# Altium PCB HuLaMachDieuKhien.PcbDoc
Units mm, origin at the board's own origin, x right, y up, seen from the top; angles counter-clockwise.
Board outline 140.76 x 140.47 mm, 2 copper layers (Top Layer, Bottom Layer); 84 components, 67 nets, 242 pads, 8 vias.
Unrouted connection lines stored in the file: 1.
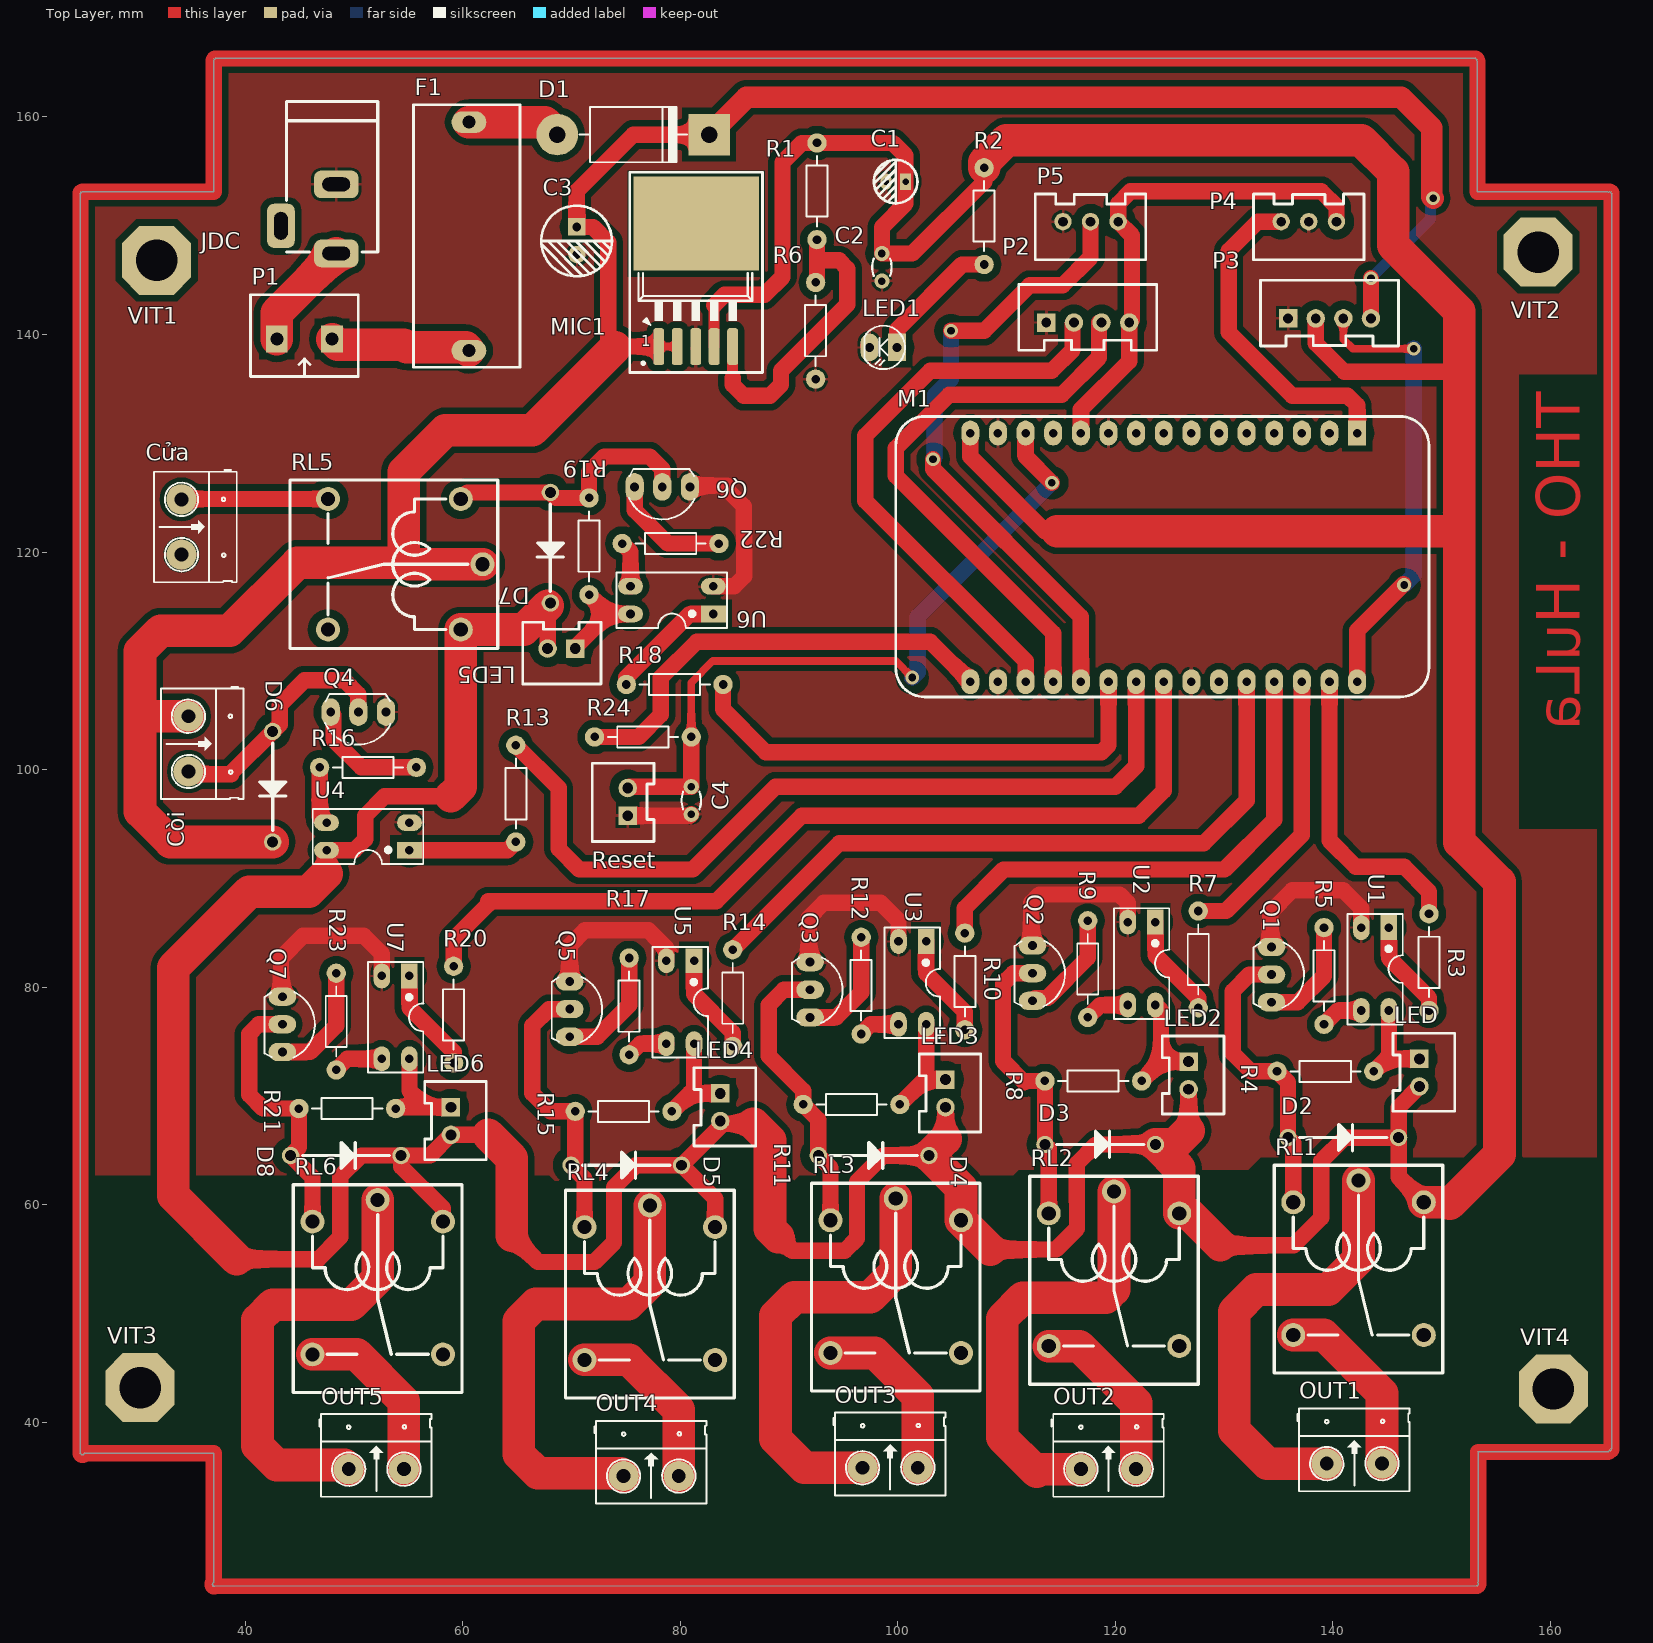
[diagram p0: Top Layer view]
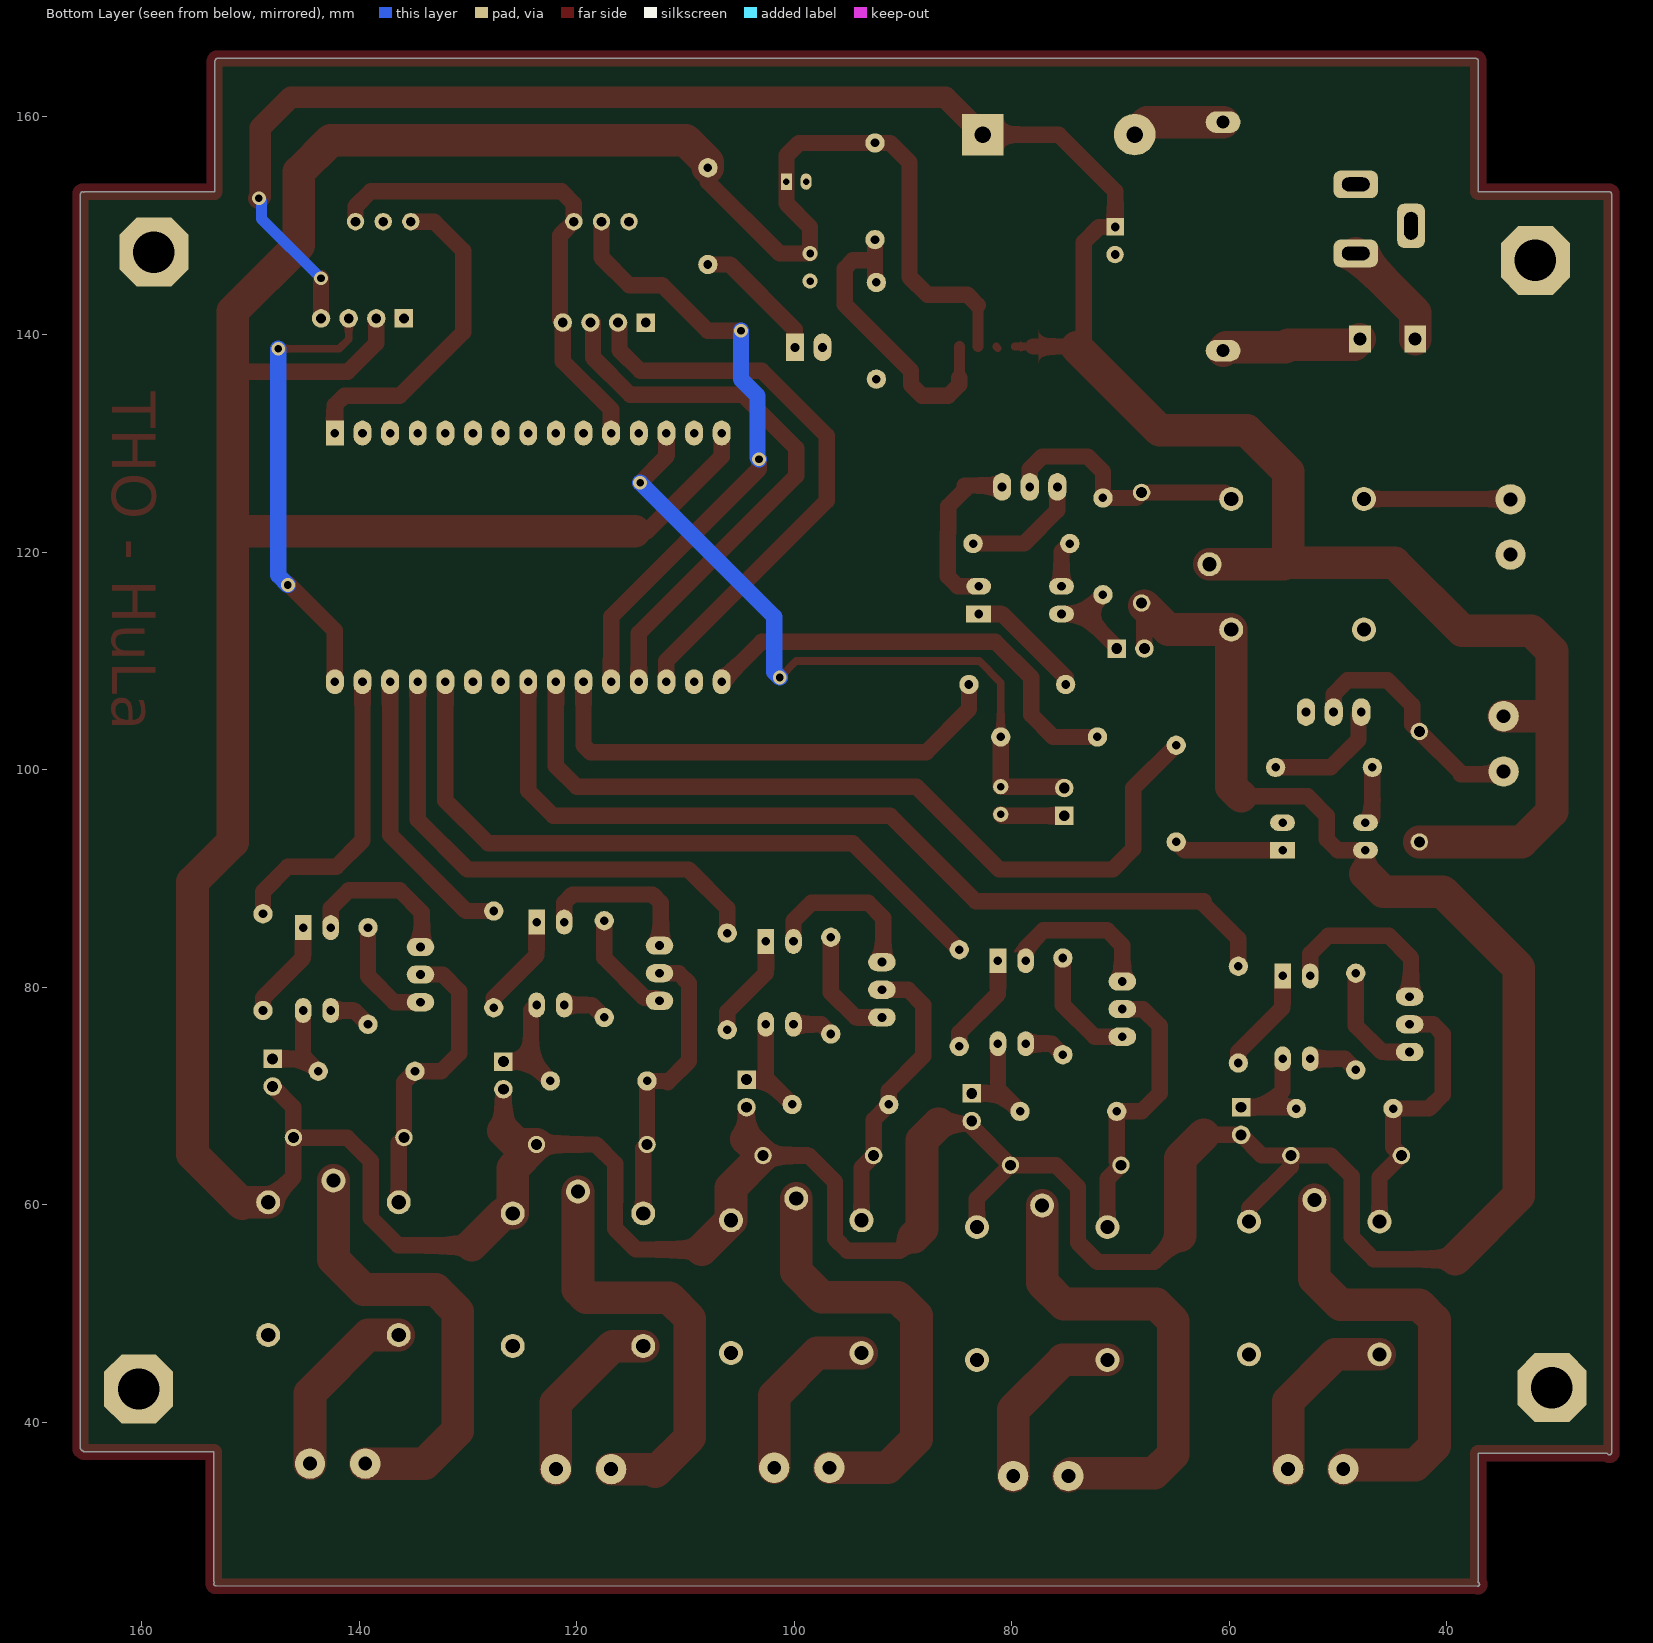
[diagram p1: Bottom Layer view, seen from below]
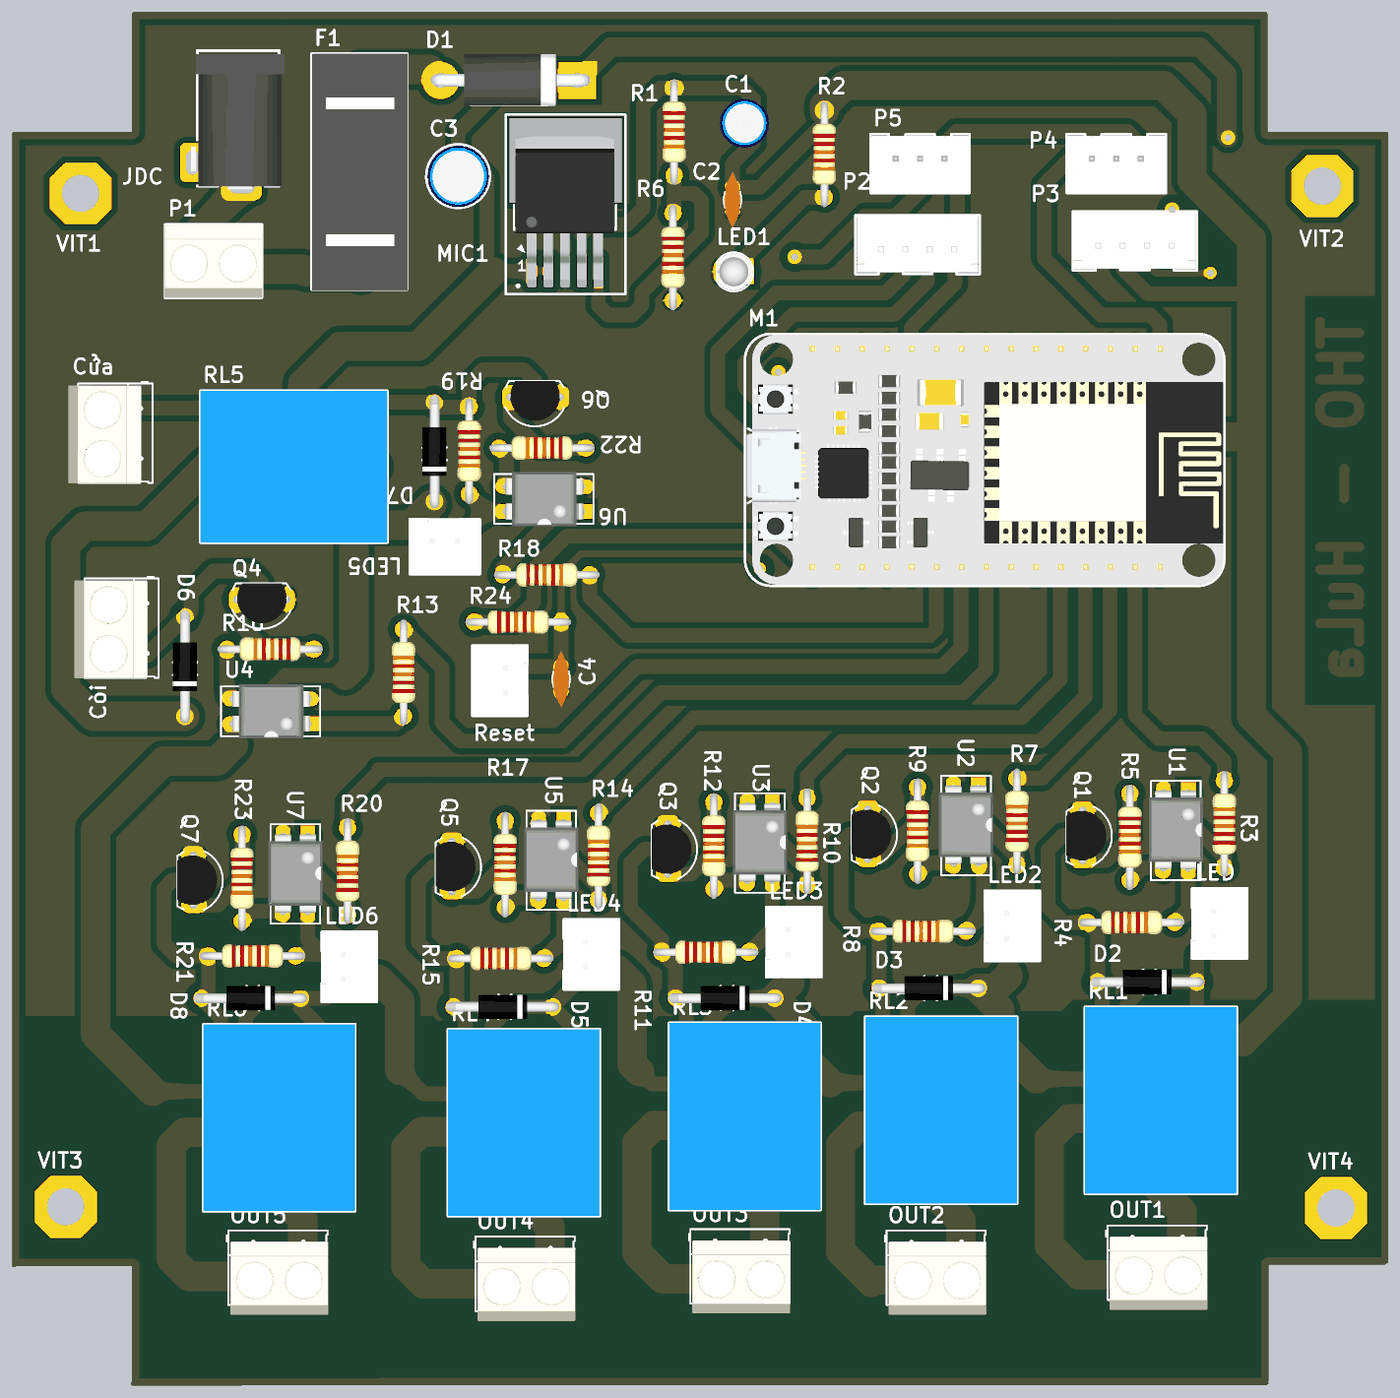
[diagram p2: 3D render of the assembled board from above, using the file's embedded part models]

## Layer stack, top to bottom
Top Solder: solder mask 0.0102, Solder Resist, Dk 3.5
Top Layer: signal copper 0.0356
Dielectric 1: dielectric 0.32, FR-4, Dk 4.8
Bottom Layer: signal copper 0.0356
Bottom Solder: solder mask 0.0102, Solder Resist, Dk 3.5

## Board outline
37.138,25.4 37.138,37.138 25.273,37.138 cw(c25.273,37.338) 25.259,37.138 cw(c25.072,37.211) 24.872,37.211 24.872,152.908 cw(c25.072,152.908) 25.072,153.108 37.138,153.108 37.138,165.1 cw(c37.338,165.1) 37.141,165.137 cw(c37.338,165.173) 37.338,165.374 153.035,165.374 cw(c153.035,165.173) 153.235,165.18 cw(c153.097,165.035) 153.297,165.035 153.297,153.108 165.227,153.108 cw(c165.227,152.908) 165.327,153.081 cw(c165.427,152.908) 165.628,152.908 165.628,37.592 cw(c165.427,37.592) 165.414,37.392 cw(c165.227,37.465) 165.227,37.265 153.362,37.265 153.362,25.403 cw(c153.162,25.403) 153.316,25.275 cw(c153.162,25.146) 153.362,25.146 cw(c153.162,25.146) 153.162,24.946 37.211,24.903 cw(c37.211,25.104) 37.165,25.299 cw(c37.338,25.4)

## Design rules (kind name [scope] priority, off if disabled: settings)
Clearance [All] p1: gap=0.6 ignorepadtopadclearanceinfootprint=FALSE except(1.2: Arc-Hole Track-Hole SMDPad-Hole THPad-Hole Via-Hole Fill-Hole Poly-Hole Region-Hole Text-Hole)
PolygonConnect [All] p1: connectstyle=Relief reliefconductorwidth=0.254 reliefentries=4 polygonreliefangle="90 Angle" airgapwidth=0.254
RoutingVias [All] p1: holewidth=0.711 width=1.27 viastyle="Through Hole" minholewidth=0.711 minwidth=1.27 maxholewidth=0.711 maxwidth=1.27
SolderMaskExpansion [All] p1: expansion=0.102
Width [All] p1: maxlimit=3 minlimit=1 preferedwidth=1.5
30 further rules are at their usual default settings.

## Components (designator, comment, footprint, x,y, rotation, side; value= is the part's Value field where it differs from the comment)
C1 "10uF-16V" "tu hoa 4mm" 99.822,154.051 r180 top
C2 "5AK220KABAA" CAPNTO2.54-3.05x1.78A 98.552,146.177 r270 top value="100nF, 16V"
C3 "100uF-35V" "tu hoa 6.5mm" 70.485,148.59 r270 top
C4 "5AK220KABAA" CAPNTO2.54-3.05x1.78A 81.026,97.155 r270 top value=C103
Còi "Header 2_1" HED2 34.798,104.902 r270 top value="Header 2"
Cửa "Header 2_1" HED2 34.163,124.841 r270 top value="Header 2" (schematic designator C?a)
D1 "1N5408" D5A 82.677,158.369 r180 top
D2 "1N4007" 1N4007 135.89,66.167 r0 top
D3 "1N4007" 1N4007 113.538,65.532 r0 top
D4 "1N4007" 1N4007 92.71,64.516 r0 top
D5 "1N4007" 1N4007 69.977,63.627 r0 top
D6 "1N4007" 1N4007 42.545,103.505 r270 top
D7 "1N4007" 1N4007 68.072,125.476 r270 top
D8 "1N4007" 1N4007 44.196,64.516 r0 top
F1 "Fuse" FUSE_BOX 60.579,138.512 r90 top
JDC "Jac DC" DC-IN 45.847,150.622 r270 top
LED "2.54-2p" "Header Duc Thang 2P 2.54" 147.955,73.406 r0 top
LED1 "LED" LED-3 99.949,138.811 r180 top value="LED 3 ly Single Colour"
LED2 "2.54-2p" "Header Duc Thang 2P 2.54" 126.746,73.152 r0 top
LED3 "2.54-2p" "Header Duc Thang 2P 2.54" 104.394,71.501 r0 top
LED4 "2.54-2p" "Header Duc Thang 2P 2.54" 83.693,70.231 r0 top
LED5 "2.54-2p" "Header Duc Thang 2P 2.54" 70.358,111.125 r270 top
LED6 "2.54-2p" "Header Duc Thang 2P 2.54" 58.928,68.961 r0 top
M1 "NodeMCU ESP8266" "NodeMCU ESP8266" 124.46,119.507 r270 top
MIC1 "U?" Mic5V 81.28,145.415 r180 top
OUT1 "Header 2_1" HED2 139.446,36.195 r0 top value="Header 2"
OUT2 "Header 2_1" HED2 116.84,35.687 r0 top value="Header 2"
OUT3 "Header 2_1" HED2 96.774,35.814 r0 top value="Header 2"
OUT4 "Header 2_1" HED2 74.803,35.052 r0 top value="Header 2"
OUT5 "Header 2_1" HED2 49.53,35.687 r0 top value="Header 2"
P1 "Công Tắc" "Medium - Header 2" 45.466,139.573 r180 top
P2 "UART" "Header Duc Thang 4p 2.54" 117.475,141.097 r180 top
P3 "SHOW_NGUỒN" "Header Duc Thang 4p 2.54" 139.7,141.478 r180 top
P4 "Khí Ga" "Header duc thang 3p 2.54" 137.795,150.368 r0 top
P5 "DHT11" "Header duc thang 3p 2.54" 117.729,150.368 r0 top
Q1 "C1815" QTO-92 134.366,81.153 r270 top
Q2 "C1815" QTO-92 112.395,81.28 r270 top
Q3 "C1815" QTO-92 91.948,79.756 r270 top
Q4 "C1815" QTO-92 50.419,105.283 r180 top
Q5 "C1815" QTO-92 69.85,77.978 r270 top
Q6 "C1815" QTO-92 78.359,125.984 r180 top
Q7 "C1815" QTO-92 43.434,76.581 r270 top
R1 "4K7" R1/4W 92.583,148.717 r90 top value="R1/4W - 1K"
R2 "1k" R1/4W 107.95,146.431 r90 top value="R1/4W - 1K"
R3 "1k" R1/4W 148.844,86.741 r270 top value="R1/4W - 1K"
R4 "1K" R1/4W 143.764,72.263 r180 top value="R1/4W - 1K"
R5 "4K7" R1/4W 139.192,76.581 r90 top value="R1/4W - 1K"
R6 "1K5" R1/4W 92.456,135.89 r90 top value="R1/4W - 1K"
R7 "1k" R1/4W 127.635,86.995 r270 top value="R1/4W - 1K"
R8 "1K" R1/4W 122.428,71.374 r180 top value="R1/4W - 1K"
R9 "4K7" R1/4W 117.475,77.216 r90 top value="R1/4W - 1K"
R10 "1k" R1/4W 106.172,84.963 r270 top value="R1/4W - 1K"
R11 "1K" R1/4W 100.203,69.215 r180 top value="R1/4W - 1K"
R12 "4K7" R1/4W 96.647,75.692 r90 top value="R1/4W - 1K"
R13 "1k" R1/4W 64.897,102.235 r270 top value="R1/4W - 1K"
R14 "1k" R1/4W 84.836,83.439 r270 top value="R1/4W - 1K"
R15 "1K" R1/4W 79.248,68.58 r180 top value="R1/4W - 1K"
R16 "4K7" R1/4W 46.863,100.203 r0 top value="R1/4W - 1K"
R17 "4K7" R1/4W 75.311,73.787 r90 top value="R1/4W - 1K"
R18 "1k" R1/4W 83.947,107.823 r180 top value="R1/4W - 1K"
R19 "1K" R1/4W 71.628,116.078 r90 top value="R1/4W - 1K"
R20 "1k" R1/4W 59.182,81.915 r270 top value="R1/4W - 1K"
R21 "1K" R1/4W 53.848,68.834 r180 top value="R1/4W - 1K"
R22 "4K7" R1/4W 74.676,120.777 r0 top value="R1/4W - 1K"
R23 "4K7" R1/4W 48.387,72.39 r90 top value="R1/4W - 1K"
R24 "1K5" R1/4W 81.026,102.997 r180 top value="R1/4W - 1K"
Reset "2.54-2p" "Header Duc Thang 2P 2.54" 75.184,95.758 r180 top
RL1 "Relay 5V/10A" RL_10A_5V 142.367,55.118 r270 top value="Relay SPDT, 10A, 12V"
RL2 "Relay 5V/10A" RL_10A_5V 119.888,54.102 r270 top value="Relay SPDT, 10A, 12V"
RL3 "Relay 5V/10A" RL_10A_5V 99.822,53.467 r270 top value="Relay SPDT, 10A, 12V"
RL4 "Relay 5V/10A" RL_10A_5V 77.216,52.832 r270 top value="Relay SPDT, 10A, 12V"
RL5 "Relay 5V/10A" RL_10A_5V 54.737,118.872 r180 top value="Relay SPDT, 10A, 12V"
RL6 "Relay 5V/10A" RL_10A_5V 52.197,53.34 r270 top value="Relay SPDT, 10A, 12V"
U1 "PC817" DIP4/W0.3 145.161,85.471 r180 top
U2 "PC817" DIP4/W0.3 123.698,85.979 r180 top
U3 "PC817" DIP4/W0.3 102.616,84.201 r180 top
U4 "PC817" DIP4/W0.3 55.118,92.583 r90 top
U5 "PC817" DIP4/W0.3 81.28,82.423 r180 top
U6 "PC817" DIP4/W0.3 83.058,114.3 r90 top
U7 "PC817" DIP4/W0.3 55.118,81.026 r180 top
VIT1 "1" VIT 31.877,146.812 r0 top
VIT2 "1" VIT 158.877,147.574 r0 top
VIT3 "1" VIT 30.353,43.18 r0 top
VIT4 "1" VIT 160.274,43.053 r0 top

## Footprints (in the part's own frame and the unit in brackets; to place one, negate y for a bottom-side part, rotate by r counter-clockwise, add the part's x,y. Pads: shape width x height; smd on the part's side, far side on the other; paste and mask are expansions set on the pad)
1N4007 [mm] "DIODE_DIP"
  round 1.6 hole 1 mask+0.1: 1(0,0) 2(10.16,0)
  silkscreen extent 1.08,-1.2 9.08,1.21, body extent -0.72,-1.25 10.88,1.25, height 2.75
CAPNTO2.54-3.05x1.78A [mm] "Capacitor, Radial, Tantalum, Non-Polarised; Body 3.05 x 1.78 x 3.43 mm (WxTxH max); Pin Spacing 2.54 mm (typ)"
  round 1.4 hole 0.7: 1(-1.27,0) 2(1.27,0)
  silkscreen extent -0.8,-0.89 0.8,0.89, body extent -2.92,-0.85 2.92,0.85, height 6.42
D5A [mil] "Diode 5A, W 200mil, L 550mil"
  round 150 hole 60: 1(550,0)
  rect 150x150 hole 60: 2(0,0)
  silkscreen extent 80,-100 470,100, body extent -52,-106 590,103, height 254
DC-IN [mil] "Jac DC input"
  rrect50% 100x160 hole 50 slot 100 at 90 deg: 1(125,100) 2(-125,100)
  rrect50% 160x100 hole 50 slot 100 at 0 deg: 3(25,-100)
  silkscreen extent -425,-80 120,250, body extent -410,-105 134,269, height 434
DIP4/W0.3 [mil] "4 PIN, W 300mil, Pin to pin 100mil"
  rect 60x90 hole 31: 1(0,0)
  oval 60x90 hole 31: 2(100,0) 3(100,300) 4(0,300)
  silkscreen extent -50,-50 150,350, body extent -59,-10 159,305, height 170
FUSE_BOX [mm]
  oval 2x3.2 hole 1.2: 1(0,0) 2(21,0)
  silkscreen extent -1.52,-4.7 22.61,5.08, body extent -1.59,-4.77 22.61,5.03, height 10.8
"Header Duc Thang 2P 2.54" [mm]
  rect 1.7x1.7 hole 1: 1(0,0)
  round 1.7 hole 1: 2(0,-2.54)
  silkscreen extent -2.41,-4.83 3.25,2.36, body extent -2.47,-4.94 3.33,2.46, height 7
"Header duc thang 3p 2.54" [mm]
  round 1.6 hole 0.9: 1(2.54,0) 2(0,0) 3(-2.54,0)
  silkscreen extent -5.08,-3.5 5.08,2.54, body extent -4.95,-3.4 4.95,2.35, height 7
"Header Duc Thang 4p 2.54" [mm]
  rect 1.7x1.7 hole 0.9: 1(3.81,0)
  round 1.7 hole 0.9: 2(1.27,0) 3(-1.27,0) 4(-3.81,0)
  silkscreen extent -6.35,-3.5 6.35,2.54, body extent -6.2,-3.4 6.2,2.35, height 7
HED2 [mil] "Header 2, 2 pin, hight 300mil, Pin to Pin 200, Colour Green"
  round 110 hole 50: 1(0,0) 2(200,0)
  silkscreen extent -106,-100 300,200, body extent -92,-140 302,155, height 394
LED-3 [mil] "LED 2 PIN, 3ly Only colour"
  rect 65x100 hole 32: 1(0,0)
  oval 65x100 hole 32: 2(100,0)
  silkscreen extent -29,-78 118,79, body extent -25,-75 113,75, height 217
"Medium - Header 2" [mm]
  rect 2x2.5 hole 1.2: 1(-2.54,0) 2(2.54,0)
  silkscreen extent -4.95,-4.08 4.95,3.43, body extent -5,-4.07 5,3.43, height 10
Mic5V [mm] "3A"
  rrect50% 1x3.4 smd: 1(3.248,6.528) 2(1.548,6.528) 4(-1.852,6.528) 5(-3.552,6.528)
  rrect50% 1x3.4 smd mask+0: 3(-0.152,6.528)
  rect 11.5x8.634 smd: 6(-0.202,-4.774)
  silkscreen extent -6.3,-9.49 5.9,8.91, body extent -5.2,-7.24 4.96,7.4, height 4.57
"NodeMCU ESP8266" [mil] "NodeMCU ESP8266"
  rect 90x65 hole 31: 1(-450,700)
  oval 90x65 hole 31: 2(-450,600) 3(-450,500) 4(-450,400) 5(-450,300) 6(-450,200) 7(-450,100) 8(-450,0) 9(-450,-100) 10(-450,-200) 11(-450,-300) 12(-450,-400) 13(-450,-500) 14(-450,-600) 15(-450,-700) 16(450,-700) 17(450,-600) 18(450,-500) 19(450,-400) 20(450,-300) 21(450,-200) 22(450,-100) 23(450,0) 24(450,100) 25(450,200) 26(450,300) 27(450,400) 28(450,500) 29(450,600) 30(450,700)
  silkscreen extent -510,-970 505,960, body extent -506,-966 500,956, height 311
QTO-92 [mil] "TO-92"
  oval 66x100 hole 32: 1(-100,0) 2(0,0) 3(100,0)
  silkscreen extent -117,-65 120,118, body extent -109,-66 109,95, height 245
R1/4W [mil] "R 1/4W, 2 Pin, 350mil"
  round 70 hole 31: 1(0,0) 2(350,0)
  silkscreen extent 48,-38 302,38, body extent -40,-47 386,47, height 111
RL_10A_5V [mm] "Relay SRD-05VDC-SL-C, 5 pin, 10A,19.1X15.5"
  round 2.2 hole 1.3 mask+0.1: 1(-7.1,0) 2(7.1,6) 3(7.1,-6) 4(-5.1,-6) 5(-5.1,6)
  silkscreen extent -8.5,-7.75 10.6,7.75, body extent -8.5,-7.75 10.6,7.75, height 15.8
"tu hoa 4mm" [mm]
  rect 1x1.5 hole 0.6: 1(-0.9,0)
  oval 1x1.5 hole 0.6: 2(0.9,0)
  silkscreen extent -2,-2 2.01,2.01, body extent -2.47,-2.47 2.58,2.58, height 11.53
"tu hoa 6.5mm" [mm]
  rect 1.6x1.6 hole 0.8: 1(-1.295,0.025)
  round 1.6 hole 0.8: 2(1.245,0.025)
  silkscreen extent -3.25,-3.25 3.25,3.25, body extent -3.15,-3.15 3.2,3.2, height 11.53
VIT [mm] "VIT"
  oct 6.35x6.35 hole 3.81: VIT1(0,0)

## Part data
C1: library part "Tu Hoa 10uF 16V 4x7", "C?m", Chung_Loai=C?m, Don_Vi=Con, Ma_Hang=MH006855, So_Chan=2, Ten_Linh_Kien="T? Hóa 10uF 16V"
C2 C4: "CAP NPO CAPNTO 22pF 100V 10%", ComponentLink1Description=Datasheet, ComponentLink1URL="D:\Dropbox\Datasheets\Passive Components\Capacitors\AVX Disc Ceramic Capacitors.pdf", Unit Price=0.003
C3: library part "Tu Hoa 100uF 35V 6x8", "C?m", Chung_Loai=C?m, Don_Vi=Con, Ma_Hang=MH006862, So_Chan=2, Ten_Linh_Kien="T? Hóa 100uF 35V"
Còi Cửa OUT1 OUT2 OUT3 OUT4 OUT5: "Header, 2-Pin", Manufacturer="Generic Components", Class=Connector
D1: library part D5A, "Diode 5A"
D2 D3 D4 D5 D6 D7 D8: "Diode LS 1A 1000V DO-41", ComponentLink1Description=Datasheet, ComponentLink1URL="D:\Dropbox\Datasheets\Diodes and Rectifiers\Diodes\1N400X.pdf", Unit Price=0.0072
JDC: library part DCIN, "Jac DC input"
LED LED2 LED3 LED4 LED5 LED6 Reset: library part "Header 2.54-2p Duc Thang", "C?m", Chung_Loai=C?m, Don_Vi=Con, Ma_Hang=MH001283, So_Chan=2, Ten_Linh_Kien="Header 2P XH2.54-2P Ð?c Th?ng"
LED1: "LED Single colour Green and Red"
MIC1: library part Mic5V, "3A"
P1: library part "Header 2 - M", "Header, 2-Pin, Medium", LatestRevisionDate=17-Jul-2002, LatestRevisionNote="Re-released for DXP Platform.", Publisher="Altium Limited"
P2 P3: library part "Header 2.54_4p Duc Thang", "C?m", Chung_Loai=C?m, Don_Vi=Con, Ma_Hang=MH001285, So_Chan=4, Ten_Linh_Kien="Header 4P XH2.54-4P Ð?c Th?ng"
P4 P5: library part "Header 2.54_3p Duc Thang", "C?m", Chung_Loai=C?m, Don_Vi=Con, Ma_Hang=MH001292, Ten_Linh_Kien="Header 3P XH2.54-3P Ð?c Th?ng"
Q1 Q2 Q3 Q4 Q5 Q6 Q7: "NPN 600mW, ECB", =C2383
R1 R2 R3 R4 R5 R6 R7 R8 R9 R10 R11 R12 R13 R14 R15 R16 R17 R18 R19 R20 R21 R22 R23 R24: library part R1/4W, "Resistor 1/4W"
RL1 RL2 RL3 RL4 RL5 RL6: library part "Relay 5V10A", "Relay SPDT,10A - 12VDC 5 Pin", ="Relay SPDT, 10A, 24V"
U1 U2 U3 U4 U5 U6 U7: "Single Opto"
VIT1 VIT2 VIT3 VIT4: library part VIT, "Oc Vit"

## Via types
v1: diameter 1.27, hole 0.711, Top Layer to Bottom Layer, 8 vias

## Nets (pads, with @x,y where several pads share a name; then routed paths per layer and width w, separated by ;. In a path a pad name is that pad's centre, name@x,y a point inside that pad or via, vN(x,y) a via of type N, cw(c..) or ccw(c..) an arc to the next point about the centre after c; other vN are vias at no path point)
3V3: M1.11 M1.16 P2.4 P4.1 P5.1 R24.2 | length 87.8
  Top Layer w1.5: R24.2 76.2,102.997 78.232,105.029 78.232,108.458 81.534,111.76 102.997,111.76 M1.16 ; M1.11 116.84,133.096 121.285,137.541 P2.4 121.539,141.351 121.539,149.098 P5.1 120.269,152.019 121.412,153.162 138.938,153.162 140.335,151.765 P4.1
5V: C1.1 C2.1 D2.2 D3.2 D4.2 D5.2 D7.2 D8.2 LED2.2 LED3.2 LED4.2 LED5.2 LED6.2 LED.2 M1.15 MIC1.4 P3.2 R1.2 R2.2 RL1.5 RL2.5 RL3.5 RL4.5 RL5.5 RL6.5 U4.4 | length 574.8
  Top Layer w1: MIC1.4 83.132,142.695
  Top Layer w1.5: 39.243,54.991 46.736,54.991 48.768,57.023 48.768,62.611 50.673,64.516 D8.2 ; 47.498,90.424 U4.4 50.038,92.583 51.054,93.599 51.054,95.758 52.832,97.536 58.928,97.536 ; RL6.5 58.197,59.659 54.356,63.5 D8.2 ; 62.357,66.421 LED6.2 57.023,64.516 D8.2 ; 64.516,57.15 66.929,54.737 72.136,54.737 73.914,56.515 73.914,61.595 75.946,63.627 D5.2 ; LED5.2 67.818,115.062 D7.2 ; 83.132,142.695 84.074,143.637 87.757,143.637 89.408,145.288 89.408,155.829 91.186,157.607 R1.2 99.568,157.607 100.722,156.453 C1.1 100.722,152.03 98.552,149.86 C2.1 101.346,147.447 107.95,154.051 R2.2 ; RL4.5 83.216,60.548 D5.2 ; 86.741,67.437 83.947,67.437 LED4.2 83.693,67.183 D5.2 ; 89.027,57.023 90.297,55.753 95.123,55.753 96.266,56.896 96.266,62.103 98.679,64.516 D4.2 ; 104.394,66.04 LED3.2 ; M1.15 106.68,128.778 113.538,121.92 114.681,121.92 ; 108.509,55.88 114.554,55.88 116.488,57.814 116.488,60.279 116.459,60.308 116.459,63.754 118.237,65.532 D3.2 ; 126.746,66.802 LED2.2 ; 129.667,56.261 136.398,56.261 138.938,58.801 138.938,64.008 141.097,66.167 D2.2 ; P3.2 138.43,139.192 141.056,136.566 151.638,136.566 ; LED.2 146.05,68.961 D2.2 ; RL1.5 146.05,62.535 D2.2
  Top Layer w3: 39.243,54.991 33.401,60.833 33.401,81.788 40.386,88.773 45.847,88.773 47.498,90.424 ; 58.928,97.536 59.837,98.445 RL5.5 65.628,112.872 D7.2@67.818,115.062 ; 62.357,66.421 64.516,64.262 64.516,57.15 ; 86.741,67.437 88.265,65.913 88.265,57.785 89.027,57.023 ; 104.394,66.04 D4.2 105.822,61.564 RL3.5 108.509,55.88 ; R2.2 107.95,155.829 109.982,157.861 142.621,157.861 145.542,154.94 145.542,148.209 151.638,142.113 151.638,136.566 151.638,121.92 ; 114.681,121.92 151.638,121.92 ; 126.746,66.802 125.476,65.532 D3.2 125.888,63.342 RL2.5 126.726,59.202 129.667,56.261 ; RL1.5 150.602,60.218 150.749,60.071 155.321,64.643 155.321,89.662 151.638,93.345 151.638,121.92
  Bottom Layer w1.5: M1.15 M1.15@106.709,130.908
12V: C3.1 Còi.1 D1.2 D6.2 MIC1.1 MIC1.2 P3.4 RL5.1 | length 225.2
  Top Layer w0.7: 78.74,138.887 MIC1.2
  Top Layer w1.5: MIC1.1 74.117,138.887 74.041,138.811 73.406,139.446 73.406,148.463 71.984,149.885 C3.1 70.485,149.911 70.485,153.162 75.692,158.369 D1.2 ; P3.4 v1(143.51,145.161)
  Top Layer w2: D1.2 86.106,161.798 146.304,161.798 149.098,159.004 149.098,152.654 v1(149.225,152.527)
  Top Layer w3: Còi.1 30.607,104.902 30.353,105.156 ; D6.2 33.147,93.345 30.353,96.139 30.353,97.917 30.353,105.156 ; RL5.1 54.991,118.872 54.864,118.999 ; 74.041,138.811 66.421,131.191 58.42,131.191 54.61,127.381 54.61,119.253 54.864,118.999 ; 30.353,105.156 30.353,110.871 32.258,112.776 38.608,112.776 44.831,118.999 54.864,118.999
  Bottom Layer w1: v1(143.51,145.161) 148.971,150.622 148.971,152.273 v1(149.225,152.527)
COI: M1.22 R13.1 | length 76.7
  Top Layer w1.5: R13.1 68.834,98.298 68.834,92.71 70.739,90.805 81.153,90.805 88.773,98.425 120.015,98.425 121.92,100.33 M1.22
CUA: M1.21 R18.1 | length 45.5
  Top Layer w1.5: R18.1 83.947,105.537 87.884,101.6 118.745,101.6 119.38,102.235 M1.21
DHT: M1.20 P5.2 | length 57.5
  Top Layer w1.5: v1(103.251,128.524) 103.251,127.635 116.84,114.046 M1.20 ; v1(104.902,140.335) 107.95,140.335 112.141,144.526 115.189,144.526 117.729,147.066 P5.2
  Bottom Layer w1.5: v1(103.251,128.524) 103.378,128.651 103.378,134.366 104.902,135.89 v1(104.902,140.335)
GND: C1.2 C2.2 C3.2 C4.2 Cửa.2 JDC.2 LED1.2 M1.10 M1.14 M1.17 M1.24 MIC1.3 P2.1 P3.1 P4.2 P5.3 Q1.1 Q2.1 Q3.1 Q4.1 Q5.1 Q6.1 Q7.1 R6.1 Reset.1 U1.2 U2.2 U3.2 U4.2 U5.2 U6.2 U7.2 | length 98.9
  Top Layer w0.7: MIC1.3@81.282,138.737 MIC1.3
  Top Layer w1.5: Q7.1 43.307,79.248 43.307,82.677 45.339,84.709 50.927,84.709 52.578,83.058 U7.2 ; Q5.1 69.85,83.82 71.247,85.217 77.089,85.217 78.74,83.566 U5.2 ; Reset.1 80.899,95.758 C4.2 ; Q6.1 81.026,126.111 84.328,126.111 84.328,125.73 85.852,124.206 85.852,121.799 85.905,121.746 85.905,117.782 84.963,116.84 U6.2 ; Q3.1 91.821,82.423 91.821,86.36 93.218,87.757 98.425,87.757 100.076,86.106 U3.2 ; LED1.2@97.282,138.938 LED1.2 ; Q2.1 112.268,83.947 112.268,87.757 113.03,88.519 120.396,88.519 121.158,87.757 U2.2 ; Q1.1 134.239,83.82 134.239,86.868 136.271,88.9 140.97,88.9 142.621,87.249 U1.2 ; P3.1 P3.1@136.017,141.605
KHIGA: M1.1 P4.3 | length 30.6
  Top Layer w1.5: P4.3 133.096,150.368 130.429,147.701 130.429,140.208 136.271,134.366 141.351,134.366 142.24,133.477 M1.1
NetC?a_1: Cửa.1 RL5.3 | length 13.5
  Top Layer w1.5: Cửa.1 34.194,124.872 RL5.3
NetCòi_2: Còi.2 D6.1 Q4.2 | length 22.6
  Top Layer w1.5: Còi.2 35.052,99.568 38.735,99.568 38.735,99.695 D6.1 43.18,104.14 43.18,105.918 45.466,108.204 49.149,108.204 50.419,106.934 Q4.2
NetD1_1: D1.1 F1.2 | length 8.6
  Top Layer w3: F1.2 67.564,159.512 D1.1
NetD2_1: D2.1 Q1.2 R4.2 RL1.4 | length 27.3
  Top Layer w1.5: Q1.2 132.334,81.153 130.81,79.629 130.81,73.914 132.461,72.263 R4.2 135.89,71.247 D2.1 136.367,65.69 RL1.4
NetD3_1: D3.1 Q2.2 R8.2 RL2.4 | length 27.3
  Top Layer w1.5: Q2.2 110.617,81.28 109.675,80.338 109.675,73.205 111.633,71.247 111.76,71.374 R8.2 D3.1 113.888,65.182 RL2.4
NetD4_1: D4.1 Q3.2 R11.2 RL3.4 | length 26.5
  Top Layer w1.5: Q3.2 89.535,79.756 88.138,78.359 88.138,73.66 91.313,70.485 R11.2 92.71,67.818 D4.1 93.822,63.404 RL3.4
NetD5_1: D5.1 Q5.2 R15.2 RL4.4 | length 26.2
  Top Layer w1.5: Q5.2 67.945,77.978 66.421,76.454 66.421,70.231 68.072,68.58 R15.2 70.358,64.008 D5.1 71.216,62.388 RL4.4
NetD7_1: D7.1 Q6.2 R19.2 RL5.4 | length 24.1
  Top Layer w1.5: RL5.4 60.441,125.476 D7.1 68.58,124.968 R19.2 71.628,127.381 73.025,128.778 77.216,128.778 78.359,127.635 Q6.2
NetD8_1: D8.1 Q7.2 R21.2 RL6.4 | length 25.6
  Top Layer w1.5: Q7.2 41.275,76.581 40.386,75.692 40.386,70.104 41.656,68.834 R21.2 44.958,65.278 D8.1 46.197,62.515 RL6.4
NetF1_1: F1.1 P1.1 | length 13
  Top Layer w3: P1.1 48.514,139.065 54.61,139.065 54.864,138.811 60.28,138.811 F1.1
NetJDC_1: JDC.1 P1.2 | length 10.1
  Top Layer w3: P1.2 42.926,141.986 JDC.1
NetLED1_1: LED1.1 R2.1 | length 12.1
  Top Layer w1.5: LED1.1 99.949,140.462 105.918,146.431 R2.1
NetLED2_1: LED2.1 R8.1 U2.4 | length 10.5
  Top Layer w1.5: R8.1 124.206,73.152 ; U2.4 124.206,77.851 124.206,73.152 ; LED2.1 124.206,73.152
NetLED3_1: LED3.1 R11.1 U3.4 | length 10.3
  Top Layer w1.5: R11.1 102.489,71.501 ; U3.4 102.616,71.628 102.489,71.501 ; LED3.1 102.489,71.501
NetLED4_1: LED4.1 R15.1 U5.4 | length 9.9
  Top Layer w1.5: R15.1 80.899,70.231 ; U5.4 81.28,70.612 80.899,70.231 ; LED4.1 80.899,70.231
NetLED5_1: LED5.1 R19.1 U6.4 | length 9
  Top Layer w1.5: LED5.1 70.358,111.252 73.406,114.3 ; R19.1 73.406,114.3 ; U6.4 73.406,114.3
NetLED6_1: LED6.1 R21.1 U7.4 | length 10.2
  Top Layer w1.5: R21.1 53.975,68.961 56.642,68.961 ; U7.4 55.118,70.485 56.642,68.961 ; LED6.1 56.642,68.961
NetLED_1: LED.1 R4.1 U1.4 | length 9.2
  Top Layer w1.5: R4.1 144.907,73.406 ; U1.4 145.161,73.66 144.907,73.406 ; LED.1 144.907,73.406
NetMIC1_5: MIC1.5 R1.1 R6.2 | length 29.1
  Top Layer w1: 84.832,136.017 MIC1.5
  Top Layer w1.5: 84.832,136.017 84.832,135.386 85.852,134.366 88.265,134.366 89.281,135.382 89.281,136.652 95.377,142.748 95.377,146.05 94.615,146.812 92.583,146.812 ; R6.2 92.583,144.907 92.583,146.812 ; R1.1 92.583,146.812
NetOUT1_1: OUT1.1 RL1.1 | length 41.5
  Top Layer w1.5: OUT1.1@139.319,36.322 OUT1.1
  Top Layer w3: OUT1.1 133.985,36.195 130.937,39.243 130.937,50.165 132.969,52.197 139.573,52.197 142.367,54.991 RL1.1
NetOUT1_2: OUT1.2 RL1.3 | length 17.5
  Top Layer w1.5: RL1.3@135.89,47.541 RL1.3
  Top Layer w3: RL1.3 139.18,48.018 144.526,42.672 OUT1.2
NetOUT2_1: OUT2.1 RL2.1 | length 40.3
  Top Layer w1.5: OUT2.1 OUT2.1@117.094,35.941
  Top Layer w3: OUT2.1 113.03,35.687 112.776,35.433 109.601,38.608 109.601,49.53 111.506,51.435 119.126,51.435 119.888,52.197 RL2.1
NetOUT2_2: OUT2.2 RL2.3 | length 17
  Top Layer w1.5: RL2.3@113.411,46.525 RL2.3
  Top Layer w3: RL2.3 116.701,47.002 121.92,41.783 OUT2.2
NetOUT3_1: OUT3.1 RL3.1 | length 39.9
  Top Layer w3: OUT3.1 91.44,35.814 88.773,38.481 88.773,49.784 90.487,51.498 97.472,51.498 99.822,53.848 RL3.1
NetOUT3_2: OUT3.2 RL3.3 | length 16.6
  Top Layer w1.5: RL3.3@93.599,46.144 RL3.3
  Top Layer w3: RL3.3 97.905,46.367 101.854,42.418 OUT3.2
NetOUT4_1: OUT4.1 RL4.1 | length 43.3
  Top Layer w3: OUT4.1 74.549,35.306 66.929,35.306 65.151,37.084 65.151,49.276 66.739,50.863 75.248,50.863 77.216,52.832 RL4.1
NetOUT4_2: OUT4.2 RL4.3 | length 16.7
  Top Layer w3: RL4.3 75.299,45.732 79.883,41.148 OUT4.2
NetOUT5_1: OUT5.1 RL6.1 | length 40.7
  Top Layer w3: OUT5.1 49.149,36.068 42.926,36.068 41.148,37.846 41.148,49.403 42.545,50.8 49.784,50.8 52.197,53.213 RL6.1
NetOUT5_2: OUT5.2 RL6.3 | length 16.4
  Top Layer w3: RL6.3 50.28,46.24 54.61,41.91 OUT5.2
NetQ1_3: Q1.3 R5.2 | length 10.3
  Top Layer w1.5: Q1.3 136.779,78.613 139.192,81.026 R5.2
NetQ2_3: Q2.3 R9.2 | length 10.1
  Top Layer w1.5: Q2.3 112.647,78.992 113.775,78.992 117.475,82.692 R9.2
NetQ3_3: Q3.3 R12.2 | length 10.7
  Top Layer w1.5: Q3.3 94.361,77.216 96.647,79.502 R12.2
NetQ4_3: Q4.3 R16.2 | length 11.3
  Top Layer w1.5: Q4.3 48.131,105.031 48.131,103.901 48.133,103.901 48.133,102.743 50.673,100.203 R16.2
NetQ5_3: Q5.3 R17.2 | length 11
  Top Layer w1.5: Q5.3 72.39,75.438 75.311,78.359 R17.2
NetQ6_3: Q6.3 R22.2 | length 11.2
  Top Layer w1.5: Q6.3 75.819,123.825 78.867,120.777 R22.2
NetQ7_3: Q7.3 R23.2 | length 10.8
  Top Layer w1.5: Q7.3 45.974,74.041 48.387,76.454 R23.2
NetR3_2: R3.2 U1.1 | length 9.1
  Top Layer w1.5: U1.1 145.161,82.677 148.844,78.994 R3.2
NetR5_1: R5.1 U1.3 | length 4
  Top Layer w1.5: R5.1 140.462,77.851 U1.3
NetR7_2: R7.2 U2.1 | length 9.5
  Top Layer w1.5: U2.1 123.698,82.931 127.635,78.994 R7.2
NetR9_1: R9.1 U2.3 | length 4.2
  Top Layer w1.5: R9.1 118.618,78.359 U2.3
NetR10_2: R10.2 U3.1 | length 9.6
  Top Layer w1.5: U3.1 102.616,81.28 106.172,77.724 R10.2
NetR12_1: R12.1 U3.3 | length 3.8
  Top Layer w1.5: R12.1 97.536,76.581 U3.3
NetR13_2: R13.2 U4.1 | length 10.1
  Top Layer w1.5: U4.1 64.135,92.583 R13.2
NetR14_2: R14.2 U5.1 | length 9.3
  Top Layer w1.5: U5.1 81.28,79.375 84.836,75.819 R14.2
NetR16_1: R16.1 U4.3 | length 5.3
  Top Layer w1.5: R16.1 46.863,95.758 U4.3
NetR17_1: R17.1 U5.3 | length 3.8
  Top Layer w1.5: R17.1 76.327,74.803 U5.3
NetR18_2: R18.2 U6.1 | length 11.1
  Top Layer w1.5: R18.2 75.057,108.458 80.899,114.3 U6.1
NetR20_2: R20.2 U7.1 | length 9.7
  Top Layer w1.5: U7.1 55.118,78.105 59.182,74.041 R20.2
NetR22_1: R22.1 U6.3 | length 4.3
  Top Layer w1.5: R22.1 75.438,120.015 U6.3
NetR23_1: R23.1 U7.3 | length 4.6
  Top Layer w1.5: R23.1 49.403,73.406 U7.3
RELAY1: M1.29 R3.1 | length 27.7
  Top Layer w1.5: M1.29 139.7,93.472 142.113,91.059 146.558,91.059 148.844,88.773 R3.1
RELAY2: M1.28 R7.1 | length 26.5
  Top Layer w1.5: R7.1 130.175,86.995 137.16,93.98 M1.28
RELAY3: M1.27 R10.1 | length 46.8
  Top Layer w1.5: R10.1 106.172,87.249 109.728,90.805 130.048,90.805 134.62,95.377 M1.27
RELAY4: M1.26 R14.1 | length 63.8
  Top Layer w1.5: R14.1 94.615,93.218 128.143,93.218 132.08,97.155 M1.26
RELAY5: M1.23 R20.1 | length 83.6
  Top Layer w1.5: R20.1 59.182,84.455 62.357,87.63 62.357,87.884 83.312,87.884 91.186,95.758 122.174,95.758 124.46,98.044 M1.23
RST: C4.1 M1.13 R24.1 Reset.2 | length 66
  Top Layer w0.7: R24.1 81.026,107.989 83.019,109.982 99.822,109.982 v1(101.346,108.458)
  Top Layer w1.5: Reset.2 75.311,98.425 C4.1 R24.1 ; M1.13 111.76,128.778 v1(114.173,126.365)
  Bottom Layer w1.5: v1(101.346,108.458) 101.854,108.966 101.854,114.046 v1(114.173,126.365)
RX: M1.19 P2.3 | length 53.1
  Top Layer w1.5: M1.19 114.3,112.522 99.822,127 99.822,129.54 104.734,134.452 115.084,134.452 118.505,137.873 118.505,141.097 P2.3
SHOW: M1.30 P3.3 | length 41.6
  Top Layer w0.7: P3.3 140.97,139.573 141.859,138.684 v1(147.447,138.684)
  Top Layer w1.5: M1.30 142.24,112.776 v1@146.494,117.03
  Bottom Layer w1.5: v1(146.558,116.967) 147.447,117.856 v1(147.447,138.684)
TX: M1.18 P2.2 | length 53.6
  Top Layer w1.5: M1.18 111.76,109.982 97.028,124.714 97.028,130.683 102.997,136.652 114.173,136.652 116.078,138.557 116.078,140.97 P2.2
pads on no net: JDC.3 M1.2 M1.3 M1.4 M1.5 M1.6 M1.7 M1.8 M1.9 M1.12 M1.25 MIC1.6 RL1.2 RL2.2 RL3.2 RL4.2 RL5.2 RL6.2 VIT1.VIT1 VIT2.VIT1 VIT3.VIT1 VIT4.VIT1
copper on no net: | length 1683.7
  Top Layer w0.4: 25.072,37.211 25.072,152.908 ; 25.146,152.908 25.072,152.908 ; 25.273,37.338 37.338,37.338 37.338,25.4 ; 37.211,25.104 153.162,25.146 ; 37.338,165.1 37.338,152.908 25.072,152.908 ; 37.338,165.173 153.035,165.173 ; 153.162,25.403 153.162,37.465 165.227,37.465 ; 153.162,165.1 153.097,165.035 153.097,152.908 165.227,152.908 ; 165.427,37.592 165.427,152.908
  Top Layer w1: 24.872,37.211 ccw(c25.072,37.211) 25.259,37.138 ccw(c25.273,37.338) 25.273,37.138 37.138,37.138 37.138,25.4 ccw(c37.338,25.4) 37.165,25.299 ccw(c37.211,25.104) 37.211,24.903 153.162,24.946 ccw(c153.162,25.146) 153.362,25.146 ccw(c153.162,25.146) 153.316,25.275 ccw(c153.162,25.403) 153.362,25.403 153.362,37.265 165.227,37.265 ccw(c165.227,37.465) 165.414,37.392 ccw(c165.427,37.592) 165.628,37.592 165.628,152.908 ccw(c165.427,152.908) 165.327,153.081 ccw(c165.227,152.908) 165.227,153.108 153.297,153.108 153.297,165.035 ccw(c153.097,165.035) 153.235,165.18 ccw(c153.035,165.173) 153.035,165.374 37.338,165.374 ccw(c37.338,165.173) 37.141,165.137 ccw(c37.338,165.1) 37.138,165.1 37.138,153.108 25.072,153.108 ccw(c25.072,152.908) 24.872,152.908 24.872,37.211
  Top Layer w1.5: 24.872,37.211 ccw(c25.072,37.211) 25.259,37.138 ccw(c25.273,37.338) 25.273,37.138 37.138,37.138 37.138,25.4 ccw(c37.338,25.4) 37.165,25.299 ccw(c37.211,25.104) 37.211,24.903 153.162,24.946 ccw(c153.162,25.146) 153.362,25.146 ccw(c153.162,25.146) 153.316,25.275 ccw(c153.162,25.403) 153.362,25.403 153.362,37.265 165.227,37.265 ccw(c165.227,37.465) 165.414,37.392 ccw(c165.427,37.592) 165.628,37.592 165.628,152.908 ccw(c165.427,152.908) 165.327,153.081 ccw(c165.227,152.908) 165.227,153.108 153.297,153.108 153.297,165.035 ccw(c153.097,165.035) 153.235,165.18 ccw(c153.035,165.173) 153.035,165.374 37.338,165.374 ccw(c37.338,165.173) 37.141,165.137 ccw(c37.338,165.1) 37.138,165.1 37.138,153.108 25.072,153.108 ccw(c25.072,152.908) 24.872,152.908 24.872,37.211

## Polygon pours and split planes (outlines as drawn)
GND on Top Layer "GND_L01_P010" (solid, remove dead copper, pour order 10): 24.698,62.701 67.952,62.701 68.46,62.193 90.431,62.193 90.939,62.701 110.624,62.701 111.132,63.209 132.214,63.209 133.357,64.352 164.98,64.352 165.107,64.479 165.053,64.533 165.053,153.125 152.723,153.125 152.788,153.19 152.788,165.317 37.037,165.317 36.964,165.391 36.964,153.125 24.772,153.125 24.698,153.052
no net on Top Layer "Top Layer-No Net" (solid, pour order 8): 25.019,62.484

## Other copper
Top Layer:
  text "THO - HuLa" at 162.687,134.747 h4 r90

## Text inside footprints (layer, text, board x,y; h text height)
MIC1: Top Overlay "1" at 76.407,138.938 h1
RL1: Mechanical 2 "COM" at 143.567,63.268 h0.8 r270; Mechanical 2 "COIL" at 146.317,61.568 h0.8 r270; Mechanical 2 "COIL" at 137.567,61.568 h0.8 r270; Mechanical 2 "2" at 147.967,48.318 h0.8 r270; Mechanical 2 "3" at 135.967,48.318 h0.8 r270; Mechanical 2 "NC" at 148.017,50.668 h0.8 r270; Mechanical 2 "NO" at 135.867,50.668 h0.8 r270; Mechanical 2 "5" at 147.967,60.468 h0.8 r270; Mechanical 2 "4" at 135.967,60.518 h0.8 r270; Mechanical 2 "1" at 141.967,62.318 h0.8 r270
RL2: Mechanical 2 "COM" at 121.088,62.252 h0.8 r270; Mechanical 2 "COIL" at 123.838,60.552 h0.8 r270; Mechanical 2 "COIL" at 115.088,60.552 h0.8 r270; Mechanical 2 "2" at 125.488,47.302 h0.8 r270; Mechanical 2 "3" at 113.488,47.302 h0.8 r270; Mechanical 2 "NC" at 125.538,49.652 h0.8 r270; Mechanical 2 "NO" at 113.388,49.652 h0.8 r270; Mechanical 2 "5" at 125.488,59.452 h0.8 r270; Mechanical 2 "4" at 113.488,59.502 h0.8 r270; Mechanical 2 "1" at 119.488,61.302 h0.8 r270
RL3: Mechanical 2 "COM" at 101.022,61.617 h0.8 r270; Mechanical 2 "COIL" at 103.772,59.917 h0.8 r270; Mechanical 2 "COIL" at 95.022,59.917 h0.8 r270; Mechanical 2 "2" at 105.422,46.667 h0.8 r270; Mechanical 2 "3" at 93.422,46.667 h0.8 r270; Mechanical 2 "NC" at 105.472,49.017 h0.8 r270; Mechanical 2 "NO" at 93.322,49.017 h0.8 r270; Mechanical 2 "5" at 105.422,58.817 h0.8 r270; Mechanical 2 "4" at 93.422,58.867 h0.8 r270; Mechanical 2 "1" at 99.422,60.667 h0.8 r270
RL4: Mechanical 2 "COM" at 78.416,60.982 h0.8 r270; Mechanical 2 "COIL" at 81.166,59.282 h0.8 r270; Mechanical 2 "COIL" at 72.416,59.282 h0.8 r270; Mechanical 2 "2" at 82.816,46.032 h0.8 r270; Mechanical 2 "3" at 70.816,46.032 h0.8 r270; Mechanical 2 "NC" at 82.866,48.382 h0.8 r270; Mechanical 2 "NO" at 70.716,48.382 h0.8 r270; Mechanical 2 "5" at 82.816,58.182 h0.8 r270; Mechanical 2 "4" at 70.816,58.232 h0.8 r270; Mechanical 2 "1" at 76.816,60.032 h0.8 r270
RL5: Mechanical 2 "COM" at 62.887,117.672 h0.8 r180; Mechanical 2 "COIL" at 61.187,114.922 h0.8 r180; Mechanical 2 "COIL" at 61.187,123.672 h0.8 r180; Mechanical 2 "2" at 47.937,113.272 h0.8 r180; Mechanical 2 "3" at 47.937,125.272 h0.8 r180; Mechanical 2 "NC" at 50.287,113.222 h0.8 r180; Mechanical 2 "NO" at 50.287,125.372 h0.8 r180; Mechanical 2 "5" at 60.087,113.272 h0.8 r180; Mechanical 2 "4" at 60.137,125.272 h0.8 r180; Mechanical 2 "1" at 61.937,119.272 h0.8 r180
RL6: Mechanical 2 "COM" at 53.397,61.49 h0.8 r270; Mechanical 2 "COIL" at 56.147,59.79 h0.8 r270; Mechanical 2 "COIL" at 47.397,59.79 h0.8 r270; Mechanical 2 "2" at 57.797,46.54 h0.8 r270; Mechanical 2 "3" at 45.797,46.54 h0.8 r270; Mechanical 2 "NC" at 57.847,48.89 h0.8 r270; Mechanical 2 "NO" at 45.697,48.89 h0.8 r270; Mechanical 2 "5" at 57.797,58.69 h0.8 r270; Mechanical 2 "4" at 45.797,58.74 h0.8 r270; Mechanical 2 "1" at 51.797,60.54 h0.8 r270